# Altium PCB ZIF_to_DSUB25.PcbDoc
Units mil, origin at the board's own origin, x right, y up, seen from the top; angles counter-clockwise.
Board outline 1220.47 x 1574.8 mil, 2 copper layers (Top Layer, Bottom Layer), stack 3.189 mil thick; 2 components, 51 nets, 78 pads, 12 vias.
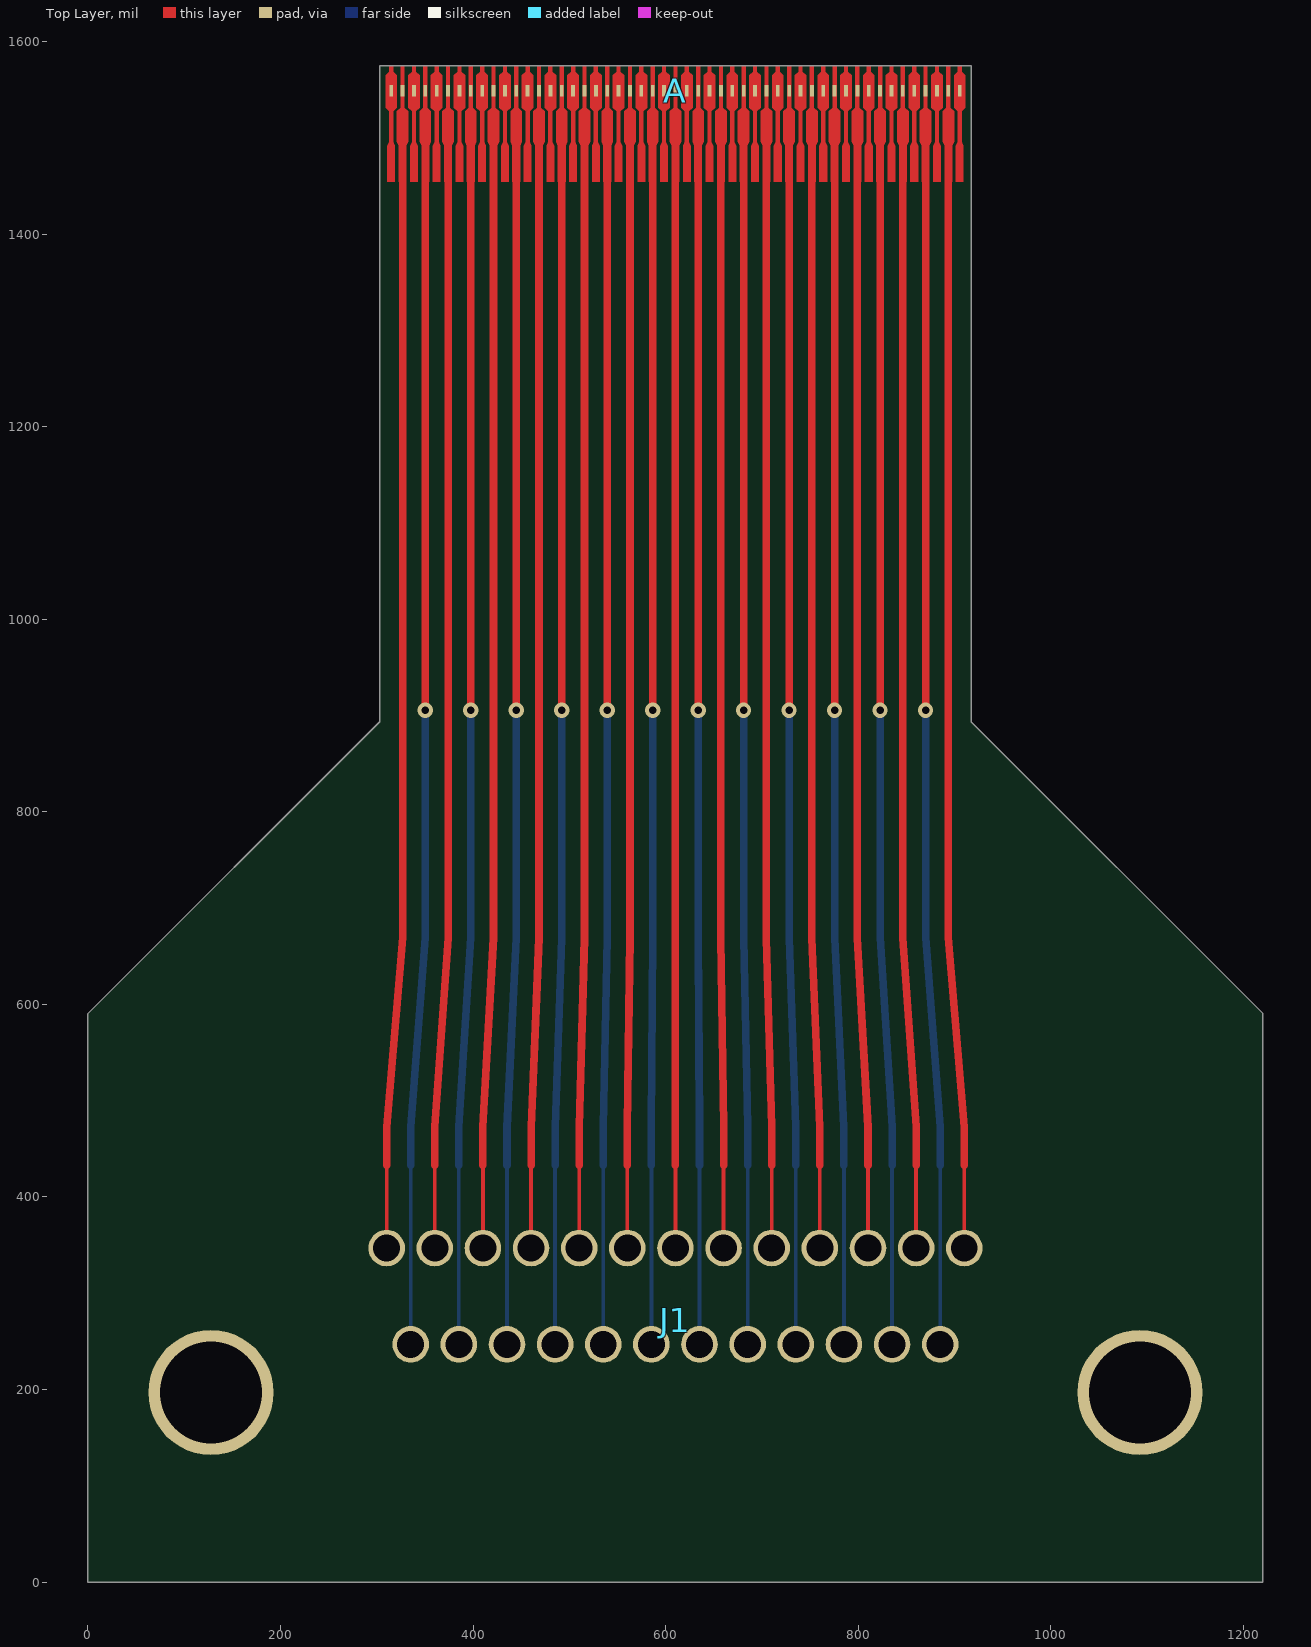
[diagram p0: Top Layer view]
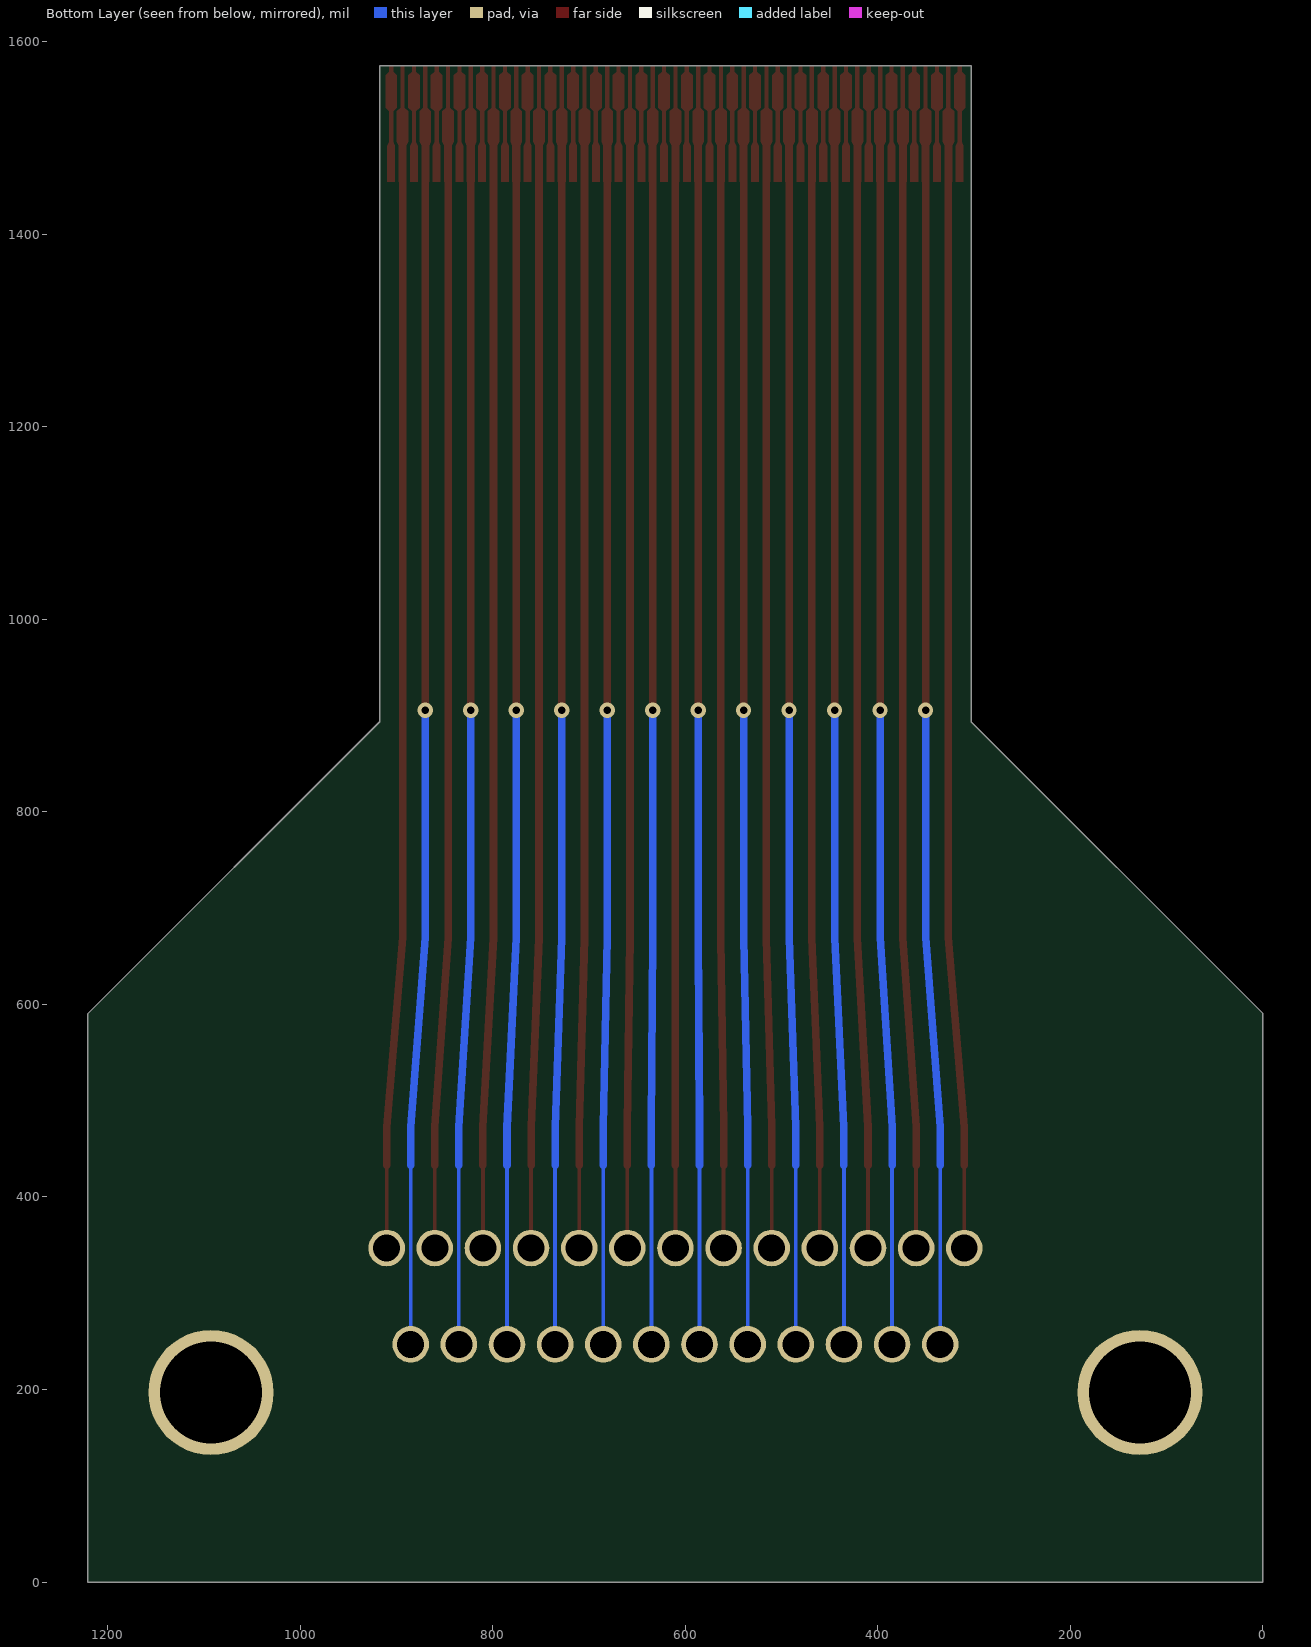
[diagram p1: Bottom Layer view, seen from below]

## Layer stack, top to bottom
Top Solder: solder mask 0.9843, Polyimide coverlay + adhesive, Dk 3.5
Top Layer: signal copper 0.7087
Polyimide core + adhesive: dielectric 1.7717, Polyimide + adhesive, Dk 3.5
Bottom Layer: signal copper 0.7087
Bottom Solder: solder mask 0.9843, Polyimide coverlay + adhesive, Dk 3.5

## Board outline
0,0 1220.47,0 1220.47,590.55 917.32,893.7 917.32,1574.8 303.15,1574.8 303.15,893.7 0,590.55

## Design rules (kind name [scope] priority, off if disabled: settings)
Clearance [All] p1: gap=2.78 ignorepadtopadclearanceinfootprint=FALSE
HoleSize [All] p1: absolutevalues=TRUE maxlimit=106.3 minlimit=1 maxpercent=80.000 minpercent=20.000
PolygonConnect [All] p1: connectstyle=Relief reliefconductorwidth=10 reliefentries=4 polygonreliefangle="90 Angle" airgapwidth=10
RoutingVias [All] p1: holewidth=28 width=50 viastyle="Through Hole" minholewidth=28 minwidth=50 maxholewidth=28 maxwidth=50
SolderMaskExpansion [All] p1: expansion=0 istentingtop=FALSE
Width [All] p1: maxlimit=11.81 minlimit=3.94 preferedwidth=10 toplayer_prefwidth=7.87 minimp=50.000000 maximp=50.000000 favimp=50.000000
29 further rules are at their usual default settings.

## Components (designator, comment, footprint, x,y, rotation, side; value= is the part's Value field where it differs from the comment)
A "Comment" FPC51_P030_STAGGERED 610.24,1574.8 r0 top
J1 "Comment" NORCOMP_381_025_112L565 310.24,346.85 r0 top

## Footprints (in the part's own frame and the unit in brackets; to place one, negate y for a bottom-side part, rotate by r counter-clockwise, add the part's x,y. Pads: shape width x height; smd on the part's side, far side on the other; paste and mask are expansions set on the pad)
FPC51_P030_STAGGERED [mm]
  rect 0.1x0.3 smd paste-2539.97 mask+0: 1(-7.5,-0.65) 2(-7.2,-0.65) 3(-6.9,-0.65) 4(-6.6,-0.65) 5(-6.3,-0.65) 6(-6,-0.65) 7(-5.7,-0.65) 8(-5.4,-0.65) 9(-5.1,-0.65) 10(-4.8,-0.65) 11(-4.5,-0.65) 12(-4.2,-0.65) 13(-3.9,-0.65) 14(-3.6,-0.65) 15(-3.3,-0.65) 16(-3,-0.65) 17(-2.7,-0.65) 18(-2.4,-0.65) 19(-2.1,-0.65) 20(-1.8,-0.65) 21(-1.5,-0.65) 22(-1.2,-0.65) 23(-0.9,-0.65) 24(-0.6,-0.65) 25(-0.3,-0.65) 26(0,-0.65) 27(0.3,-0.65) 28(0.6,-0.65) 29(0.9,-0.65) 30(1.2,-0.65) 31(1.5,-0.65) 32(1.8,-0.65) 33(2.1,-0.65) 34(2.4,-0.65) 35(2.7,-0.65) 36(3,-0.65) 37(3.3,-0.65) 38(3.6,-0.65) 39(3.9,-0.65) 40(4.2,-0.65) 41(4.5,-0.65) 42(4.8,-0.65) 43(5.1,-0.65) 44(5.4,-0.65) 45(5.7,-0.65) 46(6,-0.65) 47(6.3,-0.65) 48(6.6,-0.65) 49(6.9,-0.65) 50(7.2,-0.65) 51(7.5,-0.65)
  Top Layer region: 7.55,0 7.55,-0.15 7.65,-0.25 7.65,-1.1 7.55,-1.2 7.55,-2 7.6,-2.1 7.6,-3.05 7.4,-3.05 7.4,-2.1 7.45,-2 7.45,-1.2 7.35,-1.1 7.35,-0.25 7.45,-0.15 7.45,0
  Top Layer region: 7.25,0 7.25,-1.1 7.35,-1.2 7.35,-2 7.3,-2.1 7.3,-3.05 7.1,-3.05 7.1,-2.1 7.05,-2 7.05,-1.2 7.15,-1.1 7.15,0
  Top Layer region: 6.95,0 6.95,-0.15 7.05,-0.25 7.05,-1.1 6.95,-1.2 6.95,-2 7,-2.1 7,-3.05 6.8,-3.05 6.8,-2.1 6.85,-2 6.85,-1.2 6.75,-1.1 6.75,-0.25 6.85,-0.15 6.85,0
  Top Layer region: 6.65,0 6.65,-1.1 6.75,-1.2 6.75,-2 6.7,-2.1 6.7,-3.05 6.5,-3.05 6.5,-2.1 6.45,-2 6.45,-1.2 6.55,-1.1 6.55,0
  Top Layer region: 6.35,0 6.35,-0.15 6.45,-0.25 6.45,-1.1 6.35,-1.2 6.35,-2 6.4,-2.1 6.4,-3.05 6.2,-3.05 6.2,-2.1 6.25,-2 6.25,-1.2 6.15,-1.1 6.15,-0.25 6.25,-0.15 6.25,0
  Top Layer region: 6.05,0 6.05,-1.1 6.15,-1.2 6.15,-2 6.1,-2.1 6.1,-3.05 5.9,-3.05 5.9,-2.1 5.85,-2 5.85,-1.2 5.95,-1.1 5.95,0
  Top Layer region: 5.75,0 5.75,-0.15 5.85,-0.25 5.85,-1.1 5.75,-1.2 5.75,-2 5.8,-2.1 5.8,-3.05 5.6,-3.05 5.6,-2.1 5.65,-2 5.65,-1.2 5.55,-1.1 5.55,-0.25 5.65,-0.15 5.65,0
  Top Layer region: 5.45,0 5.45,-1.1 5.55,-1.2 5.55,-2 5.5,-2.1 5.5,-3.05 5.3,-3.05 5.3,-2.1 5.25,-2 5.25,-1.2 5.35,-1.1 5.35,0
  Top Layer region: 5.15,0 5.15,-0.15 5.25,-0.25 5.25,-1.1 5.15,-1.2 5.15,-2 5.2,-2.1 5.2,-3.05 5,-3.05 5,-2.1 5.05,-2 5.05,-1.2 4.95,-1.1 4.95,-0.25 5.05,-0.15 5.05,0
  Top Layer region: 4.85,0 4.85,-1.1 4.95,-1.2 4.95,-2 4.9,-2.1 4.9,-3.05 4.7,-3.05 4.7,-2.1 4.65,-2 4.65,-1.2 4.75,-1.1 4.75,0
  Top Layer region: 4.55,0 4.55,-0.15 4.65,-0.25 4.65,-1.1 4.55,-1.2 4.55,-2 4.6,-2.1 4.6,-3.05 4.4,-3.05 4.4,-2.1 4.45,-2 4.45,-1.2 4.35,-1.1 4.35,-0.25 4.45,-0.15 4.45,0
  Top Layer region: 4.25,0 4.25,-1.1 4.35,-1.2 4.35,-2 4.3,-2.1 4.3,-3.05 4.1,-3.05 4.1,-2.1 4.05,-2 4.05,-1.2 4.15,-1.1 4.15,0
  Top Layer region: 3.95,0 3.95,-0.15 4.05,-0.25 4.05,-1.1 3.95,-1.2 3.95,-2 4,-2.1 4,-3.05 3.8,-3.05 3.8,-2.1 3.85,-2 3.85,-1.2 3.75,-1.1 3.75,-0.25 3.85,-0.15 3.85,0
  Top Layer region: 3.65,0 3.65,-1.1 3.75,-1.2 3.75,-2 3.7,-2.1 3.7,-3.05 3.5,-3.05 3.5,-2.1 3.45,-2 3.45,-1.2 3.55,-1.1 3.55,0
  Top Layer region: 3.35,0 3.35,-0.15 3.45,-0.25 3.45,-1.1 3.35,-1.2 3.35,-2 3.4,-2.1 3.4,-3.05 3.2,-3.05 3.2,-2.1 3.25,-2 3.25,-1.2 3.15,-1.1 3.15,-0.25 3.25,-0.15 3.25,0
  Top Layer region: 3.05,0 3.05,-1.1 3.15,-1.2 3.15,-2 3.1,-2.1 3.1,-3.05 2.9,-3.05 2.9,-2.1 2.85,-2 2.85,-1.2 2.95,-1.1 2.95,0
  Top Layer region: 2.75,0 2.75,-0.15 2.85,-0.25 2.85,-1.1 2.75,-1.2 2.75,-2 2.8,-2.1 2.8,-3.05 2.6,-3.05 2.6,-2.1 2.65,-2 2.65,-1.2 2.55,-1.1 2.55,-0.25 2.65,-0.15 2.65,0
  Top Layer region: 2.45,0 2.45,-1.1 2.55,-1.2 2.55,-2 2.5,-2.1 2.5,-3.05 2.3,-3.05 2.3,-2.1 2.25,-2 2.25,-1.2 2.35,-1.1 2.35,0
  Top Layer region: 2.15,0 2.15,-0.15 2.25,-0.25 2.25,-1.1 2.15,-1.2 2.15,-2 2.2,-2.1 2.2,-3.05 2,-3.05 2,-2.1 2.05,-2 2.05,-1.2 1.95,-1.1 1.95,-0.25 2.05,-0.15 2.05,0
  Top Layer region: 1.85,0 1.85,-1.1 1.95,-1.2 1.95,-2 1.9,-2.1 1.9,-3.05 1.7,-3.05 1.7,-2.1 1.65,-2 1.65,-1.2 1.75,-1.1 1.75,0
  Top Layer region: 1.55,0 1.55,-0.15 1.65,-0.25 1.65,-1.1 1.55,-1.2 1.55,-2 1.6,-2.1 1.6,-3.05 1.4,-3.05 1.4,-2.1 1.45,-2 1.45,-1.2 1.35,-1.1 1.35,-0.25 1.45,-0.15 1.45,0
  Top Layer region: 1.25,0 1.25,-1.1 1.35,-1.2 1.35,-2 1.3,-2.1 1.3,-3.05 1.1,-3.05 1.1,-2.1 1.05,-2 1.05,-1.2 1.15,-1.1 1.15,0
  Top Layer region: 0.95,0 0.95,-0.15 1.05,-0.25 1.05,-1.1 0.95,-1.2 0.95,-2 1,-2.1 1,-3.05 0.8,-3.05 0.8,-2.1 0.85,-2 0.85,-1.2 0.75,-1.1 0.75,-0.25 0.85,-0.15 0.85,0
  Top Layer region: 0.65,0 0.65,-1.1 0.75,-1.2 0.75,-2 0.7,-2.1 0.7,-3.05 0.5,-3.05 0.5,-2.1 0.45,-2 0.45,-1.2 0.55,-1.1 0.55,0
  Top Layer region: 0.35,0 0.35,-0.15 0.45,-0.25 0.45,-1.1 0.35,-1.2 0.35,-2 0.4,-2.1 0.4,-3.05 0.2,-3.05 0.2,-2.1 0.25,-2 0.25,-1.2 0.15,-1.1 0.15,-0.25 0.25,-0.15 0.25,0
  Top Layer region: 0.05,0 0.05,-1.1 0.15,-1.2 0.15,-2 0.1,-2.1 0.1,-3.05 -0.1,-3.05 -0.1,-2.1 -0.15,-2 -0.15,-1.2 -0.05,-1.1 -0.05,0
  Top Layer region: -0.25,0 -0.25,-0.15 -0.15,-0.25 -0.15,-1.1 -0.25,-1.2 -0.25,-2 -0.2,-2.1 -0.2,-3.05 -0.4,-3.05 -0.4,-2.1 -0.35,-2 -0.35,-1.2 -0.45,-1.1 -0.45,-0.25 -0.35,-0.15 -0.35,0
  Top Layer region: -0.55,0 -0.55,-1.1 -0.45,-1.2 -0.45,-2 -0.5,-2.1 -0.5,-3.05 -0.7,-3.05 -0.7,-2.1 -0.75,-2 -0.75,-1.2 -0.65,-1.1 -0.65,0
  Top Layer region: -0.85,0 -0.85,-0.15 -0.75,-0.25 -0.75,-1.1 -0.85,-1.2 -0.85,-2 -0.8,-2.1 -0.8,-3.05 -1,-3.05 -1,-2.1 -0.95,-2 -0.95,-1.2 -1.05,-1.1 -1.05,-0.25 -0.95,-0.15 -0.95,0
  Top Layer region: -1.15,0 -1.15,-1.1 -1.05,-1.2 -1.05,-2 -1.1,-2.1 -1.1,-3.05 -1.3,-3.05 -1.3,-2.1 -1.35,-2 -1.35,-1.2 -1.25,-1.1 -1.25,0
  Top Layer region: -1.45,0 -1.45,-0.15 -1.35,-0.25 -1.35,-1.1 -1.45,-1.2 -1.45,-2 -1.4,-2.1 -1.4,-3.05 -1.6,-3.05 -1.6,-2.1 -1.55,-2 -1.55,-1.2 -1.65,-1.1 -1.65,-0.25 -1.55,-0.15 -1.55,0
  Top Layer region: -1.75,0 -1.75,-1.1 -1.65,-1.2 -1.65,-2 -1.7,-2.1 -1.7,-3.05 -1.9,-3.05 -1.9,-2.1 -1.95,-2 -1.95,-1.2 -1.85,-1.1 -1.85,0
  Top Layer region: -2.05,0 -2.05,-0.15 -1.95,-0.25 -1.95,-1.1 -2.05,-1.2 -2.05,-2 -2,-2.1 -2,-3.05 -2.2,-3.05 -2.2,-2.1 -2.15,-2 -2.15,-1.2 -2.25,-1.1 -2.25,-0.25 -2.15,-0.15 -2.15,0
  Top Layer region: -2.35,0 -2.35,-1.1 -2.25,-1.2 -2.25,-2 -2.3,-2.1 -2.3,-3.05 -2.5,-3.05 -2.5,-2.1 -2.55,-2 -2.55,-1.2 -2.45,-1.1 -2.45,0
  Top Layer region: -2.65,0 -2.65,-0.15 -2.55,-0.25 -2.55,-1.1 -2.65,-1.2 -2.65,-2 -2.6,-2.1 -2.6,-3.05 -2.8,-3.05 -2.8,-2.1 -2.75,-2 -2.75,-1.2 -2.85,-1.1 -2.85,-0.25 -2.75,-0.15 -2.75,0
  Top Layer region: -2.95,0 -2.95,-1.1 -2.85,-1.2 -2.85,-2 -2.9,-2.1 -2.9,-3.05 -3.1,-3.05 -3.1,-2.1 -3.15,-2 -3.15,-1.2 -3.05,-1.1 -3.05,0
  Top Layer region: -3.25,0 -3.25,-0.15 -3.15,-0.25 -3.15,-1.1 -3.25,-1.2 -3.25,-2 -3.2,-2.1 -3.2,-3.05 -3.4,-3.05 -3.4,-2.1 -3.35,-2 -3.35,-1.2 -3.45,-1.1 -3.45,-0.25 -3.35,-0.15 -3.35,0
  Top Layer region: -3.55,0 -3.55,-1.1 -3.45,-1.2 -3.45,-2 -3.5,-2.1 -3.5,-3.05 -3.7,-3.05 -3.7,-2.1 -3.75,-2 -3.75,-1.2 -3.65,-1.1 -3.65,0
  Top Layer region: -3.85,0 -3.85,-0.15 -3.75,-0.25 -3.75,-1.1 -3.85,-1.2 -3.85,-2 -3.8,-2.1 -3.8,-3.05 -4,-3.05 -4,-2.1 -3.95,-2 -3.95,-1.2 -4.05,-1.1 -4.05,-0.25 -3.95,-0.15 -3.95,0
  Top Layer region: -4.15,0 -4.15,-1.1 -4.05,-1.2 -4.05,-2 -4.1,-2.1 -4.1,-3.05 -4.3,-3.05 -4.3,-2.1 -4.35,-2 -4.35,-1.2 -4.25,-1.1 -4.25,0
  Top Layer region: -4.45,0 -4.45,-0.15 -4.35,-0.25 -4.35,-1.1 -4.45,-1.2 -4.45,-2 -4.4,-2.1 -4.4,-3.05 -4.6,-3.05 -4.6,-2.1 -4.55,-2 -4.55,-1.2 -4.65,-1.1 -4.65,-0.25 -4.55,-0.15 -4.55,0
  Top Layer region: -4.75,0 -4.75,-1.1 -4.65,-1.2 -4.65,-2 -4.7,-2.1 -4.7,-3.05 -4.9,-3.05 -4.9,-2.1 -4.95,-2 -4.95,-1.2 -4.85,-1.1 -4.85,0
  Top Layer region: -5.05,0 -5.05,-0.15 -4.95,-0.25 -4.95,-1.1 -5.05,-1.2 -5.05,-2 -5,-2.1 -5,-3.05 -5.2,-3.05 -5.2,-2.1 -5.15,-2 -5.15,-1.2 -5.25,-1.1 -5.25,-0.25 -5.15,-0.15 -5.15,0
  Top Layer region: -5.35,0 -5.35,-1.1 -5.25,-1.2 -5.25,-2 -5.3,-2.1 -5.3,-3.05 -5.5,-3.05 -5.5,-2.1 -5.55,-2 -5.55,-1.2 -5.45,-1.1 -5.45,0
  Top Layer region: -5.65,0 -5.65,-0.15 -5.55,-0.25 -5.55,-1.1 -5.65,-1.2 -5.65,-2 -5.6,-2.1 -5.6,-3.05 -5.8,-3.05 -5.8,-2.1 -5.75,-2 -5.75,-1.2 -5.85,-1.1 -5.85,-0.25 -5.75,-0.15 -5.75,0
  Top Layer region: -5.95,0 -5.95,-1.1 -5.85,-1.2 -5.85,-2 -5.9,-2.1 -5.9,-3.05 -6.1,-3.05 -6.1,-2.1 -6.15,-2 -6.15,-1.2 -6.05,-1.1 -6.05,0
  Top Layer region: -6.25,0 -6.25,-0.15 -6.15,-0.25 -6.15,-1.1 -6.25,-1.2 -6.25,-2 -6.2,-2.1 -6.2,-3.05 -6.4,-3.05 -6.4,-2.1 -6.35,-2 -6.35,-1.2 -6.45,-1.1 -6.45,-0.25 -6.35,-0.15 -6.35,0
  Top Layer region: -6.55,0 -6.55,-1.1 -6.45,-1.2 -6.45,-2 -6.5,-2.1 -6.5,-3.05 -6.7,-3.05 -6.7,-2.1 -6.75,-2 -6.75,-1.2 -6.65,-1.1 -6.65,0
  Top Layer region: -6.85,0 -6.85,-0.15 -6.75,-0.25 -6.75,-1.1 -6.85,-1.2 -6.85,-2 -6.8,-2.1 -6.8,-3.05 -7,-3.05 -7,-2.1 -6.95,-2 -6.95,-1.2 -7.05,-1.1 -7.05,-0.25 -6.95,-0.15 -6.95,0
  Top Layer region: -7.15,0 -7.15,-1.1 -7.05,-1.2 -7.05,-2 -7.1,-2.1 -7.1,-3.05 -7.3,-3.05 -7.3,-2.1 -7.35,-2 -7.35,-1.2 -7.25,-1.1 -7.25,0
  Top Layer region: -7.45,0 -7.45,-0.15 -7.35,-0.25 -7.35,-1.1 -7.45,-1.2 -7.45,-2 -7.4,-2.1 -7.4,-3.05 -7.6,-3.05 -7.6,-2.1 -7.55,-2 -7.55,-1.2 -7.65,-1.1 -7.65,-0.25 -7.55,-0.15 -7.55,0
NORCOMP_381_025_112L565 [mil]
  round 38 hole 28 paste-99999 mask+1.97: 1(0,0) 2(50,0) 3(100,0) 4(150,0) 5(200,0) 6(250,0) 7(300,0) 8(350,0) 9(400,0) 10(450,0) 11(500,0) 12(550,0) 13(600,0) 14(25,-100) 15(75,-100) 16(125,-100) 17(175,-100) 18(225,-100) 19(275,-100) 20(325,-100) 21(375,-100) 22(425,-100) 23(475,-100) 24(525,-100) 25(575,-100)
  round 129.92 hole 105.91 paste-99999 mask+1.97: BL1(-182.48,-150) BL2(782.48,-150)

## Part data
A: library part FPC51_P030_STAGGERED
J1: library part NORCOMP_381_025_112L565

## Via types
v1: diameter 15.75, hole 7.87, Top Layer to Bottom Layer, 12 vias

## Nets (pads, with @x,y where several pads share a name; then routed paths per layer and width w, separated by ;. In a path a pad name is that pad's centre, name@x,y a point inside that pad or via, vN(x,y) a via of type N, cw(c..) or ccw(c..) an arc to the next point about the centre after c; other vN are vias at no path point)
DSUB_01: A.2 J1.1 | length 1108.6
  Top Layer w3.94: J1.1 310.24,433.07
  Top Layer w7.87: 310.24,433.07 310.24,472.44 326.77,669.29 326.77,1454.72
DSUB_02: A.6 J1.2 | length 1108.4
  Top Layer w3.94: J1.2 360.24,433.07
  Top Layer w7.87: 360.24,433.07 360.24,472.44 374.02,669.29 374.02,1454.72
DSUB_03: A.10 J1.3 | length 1108.2
  Top Layer w3.94: J1.3 410.24,433.07
  Top Layer w7.87: 410.24,433.07 410.24,472.44 421.26,669.29 421.26,1454.72
DSUB_04: A.14 J1.4 | length 1108
  Top Layer w3.94: J1.4 460.24,433.07
  Top Layer w7.87: 460.24,433.07 460.24,472.44 468.5,669.29 468.5,1454.72
DSUB_05: A.18 J1.5 | length 1108
  Top Layer w3.94: J1.5 510.24,433.07
  Top Layer w7.87: 510.24,433.07 510.24,472.44 515.75,669.29 515.75,1454.72
DSUB_06: A.22 J1.6 | length 1107.9
  Top Layer w3.94: J1.6 560.24,433.07
  Top Layer w7.87: 560.24,433.07 560.24,472.44 562.99,669.29 562.99,1454.72
DSUB_07: A.26 J1.7 | length 1107.9
  Top Layer w3.94: J1.7 610.24,433.07
  Top Layer w7.87: 610.24,433.07 610.24,472.44 610.24,669.29 610.24,1454.72
DSUB_08: A.30 J1.8 | length 1107.9
  Top Layer w3.94: J1.8 660.24,433.07
  Top Layer w7.87: 657.48,1454.72 657.48,669.29 660.24,472.44 660.24,433.07
DSUB_09: A.34 J1.9 | length 1108
  Top Layer w3.94: J1.9 710.24,433.07
  Top Layer w7.87: 704.72,1454.72 704.72,669.29 710.24,472.44 710.24,433.07
DSUB_10: A.38 J1.10 | length 1108
  Top Layer w3.94: J1.10 760.24,433.07
  Top Layer w7.87: 751.97,1454.72 751.97,669.29 760.24,472.44 760.24,433.07
DSUB_11: A.42 J1.11 | length 1108.2
  Top Layer w3.94: J1.11 810.24,433.07
  Top Layer w7.87: 799.21,1454.72 799.21,669.29 810.24,472.44 810.24,433.07
DSUB_12: A.46 J1.12 | length 1108.4
  Top Layer w3.94: J1.12 860.24,433.07
  Top Layer w7.87: 846.46,1454.72 846.46,669.29 860.24,472.44 860.24,433.07
DSUB_13: A.50 J1.13 | length 1108.6
  Top Layer w3.94: J1.13 910.24,433.07
  Top Layer w7.87: 893.7,1454.72 893.7,669.29 910.24,472.44 910.24,433.07
DSUB_14: A.4 J1.14 | length 1208.5
  Top Layer w7.87: v1(350.39,905.51) 350.39,1454.72
  Bottom Layer w3.94: J1.14 335.24,433.07
  Bottom Layer w7.87: 335.24,433.07 335.24,472.44 350.39,669.29 v1(350.39,905.51)
DSUB_15: A.8 J1.15 | length 1208.3
  Top Layer w7.87: v1(397.64,905.51) 397.64,1454.72
  Bottom Layer w3.94: J1.15 385.24,433.07
  Bottom Layer w7.87: 385.24,433.07 385.24,472.44 397.64,669.29 v1(397.64,905.51)
DSUB_16: A.12 J1.16 | length 1208.1
  Top Layer w7.87: v1(444.88,905.51) 444.88,1454.72
  Bottom Layer w3.94: J1.16 435.24,433.07
  Bottom Layer w7.87: 435.24,433.07 435.24,472.44 444.88,669.29 v1(444.88,905.51)
DSUB_17: A.16 J1.17 | length 1208
  Top Layer w7.87: v1(492.13,905.51) 492.13,1454.72
  Bottom Layer w3.94: J1.17 485.24,433.07
  Bottom Layer w7.87: 485.24,433.07 485.24,472.44 492.13,669.29 v1(492.13,905.51)
DSUB_18: A.20 J1.18 | length 1207.9
  Top Layer w7.87: v1(539.37,905.51) 539.37,1454.72
  Bottom Layer w3.94: J1.18 535.24,433.07
  Bottom Layer w7.87: 535.24,433.07 535.24,472.44 539.37,669.29 v1(539.37,905.51)
DSUB_19: A.24 J1.19 | length 1207.9
  Top Layer w7.87: v1(586.61,905.51) 586.61,1454.72
  Bottom Layer w3.94: J1.19 585.24,433.07
  Bottom Layer w7.87: 585.24,433.07 585.24,472.44 586.61,669.29 v1(586.61,905.51)
DSUB_20: A.28 J1.20 | length 1207.9
  Top Layer w7.87: v1(633.86,905.51) 633.86,1454.72
  Bottom Layer w3.94: J1.20 635.24,433.07
  Bottom Layer w7.87: v1(633.86,905.51) 633.86,669.29 635.24,472.44 635.24,433.07
DSUB_21: A.32 J1.21 | length 1207.9
  Top Layer w7.87: v1(681.1,905.51) 681.1,1454.72
  Bottom Layer w3.94: J1.21 685.24,433.07
  Bottom Layer w7.87: v1(681.1,905.51) 681.1,669.29 685.24,472.44 685.24,433.07
DSUB_22: A.36 J1.22 | length 1208
  Top Layer w7.87: v1(728.35,905.51) 728.35,1454.72
  Bottom Layer w3.94: J1.22 735.24,433.07
  Bottom Layer w7.87: v1(728.35,905.51) 728.35,669.29 735.24,472.44 735.24,433.07
DSUB_23: A.40 J1.23 | length 1208.1
  Top Layer w7.87: v1(775.59,905.51) 775.59,1454.72
  Bottom Layer w3.94: J1.23 785.24,433.07
  Bottom Layer w7.87: v1(775.59,905.51) 775.59,669.29 785.24,472.44 785.24,433.07
DSUB_24: A.44 J1.24 | length 1208.3
  Top Layer w7.87: v1(822.83,905.51) 822.83,1454.72
  Bottom Layer w3.94: J1.24 835.24,433.07
  Bottom Layer w7.87: v1(822.83,905.51) 822.83,669.29 835.24,472.44 835.24,433.07
DSUB_25: A.48 J1.25 | length 1208.5
  Top Layer w7.87: v1(870.08,905.51) 870.08,1454.72
  Bottom Layer w3.94: J1.25 885.24,433.07
  Bottom Layer w7.87: v1(870.08,905.51) 870.08,669.29 885.24,472.44 885.24,433.07
NC_A01: A.1
NC_A03: A.3
NC_A05: A.5
NC_A07: A.7
NC_A09: A.9
NC_A11: A.11
NC_A13: A.13
NC_A15: A.15
NC_A17: A.17
NC_A19: A.19
NC_A21: A.21
NC_A23: A.23
NC_A25: A.25
NC_A27: A.27
NC_A29: A.29
NC_A31: A.31
NC_A33: A.33
NC_A35: A.35
NC_A37: A.37
NC_A39: A.39
NC_A41: A.41
NC_A43: A.43
NC_A45: A.45
NC_A47: A.47
NC_A49: A.49
NC_A51: A.51
pads on no net: J1.BL1 J1.BL2

## Silkscreen, mask and mechanical layers (free items; w line width, h text height)
Top Solder:
  region: 312.3,223.91 908.17,223.91 908.17,269.79 312.3,269.79
  region: 287.3,323.91 933.17,323.91 933.17,369.79 287.3,369.79
  region: 302.76,1456.69 917.72,1456.69 917.72,1575.2 302.76,1575.2
Bottom Solder:
  region: 312.3,223.91 908.17,223.91 908.17,269.79 312.3,269.79
  region: 287.3,323.91 933.17,323.91 933.17,369.79 287.3,369.79
Mechanical 2:
  lines w1.18: 0,0 0,590.55 1220.47,590.55 1220.47,0 0,0 ; 303.15,1417.32 303.15,1574.8 917.32,1574.8 917.32,1417.32 303.15,1417.32